# EAGLE board mbed 6LoWPAN Border Router HAT (EAGLE 7.6.0)
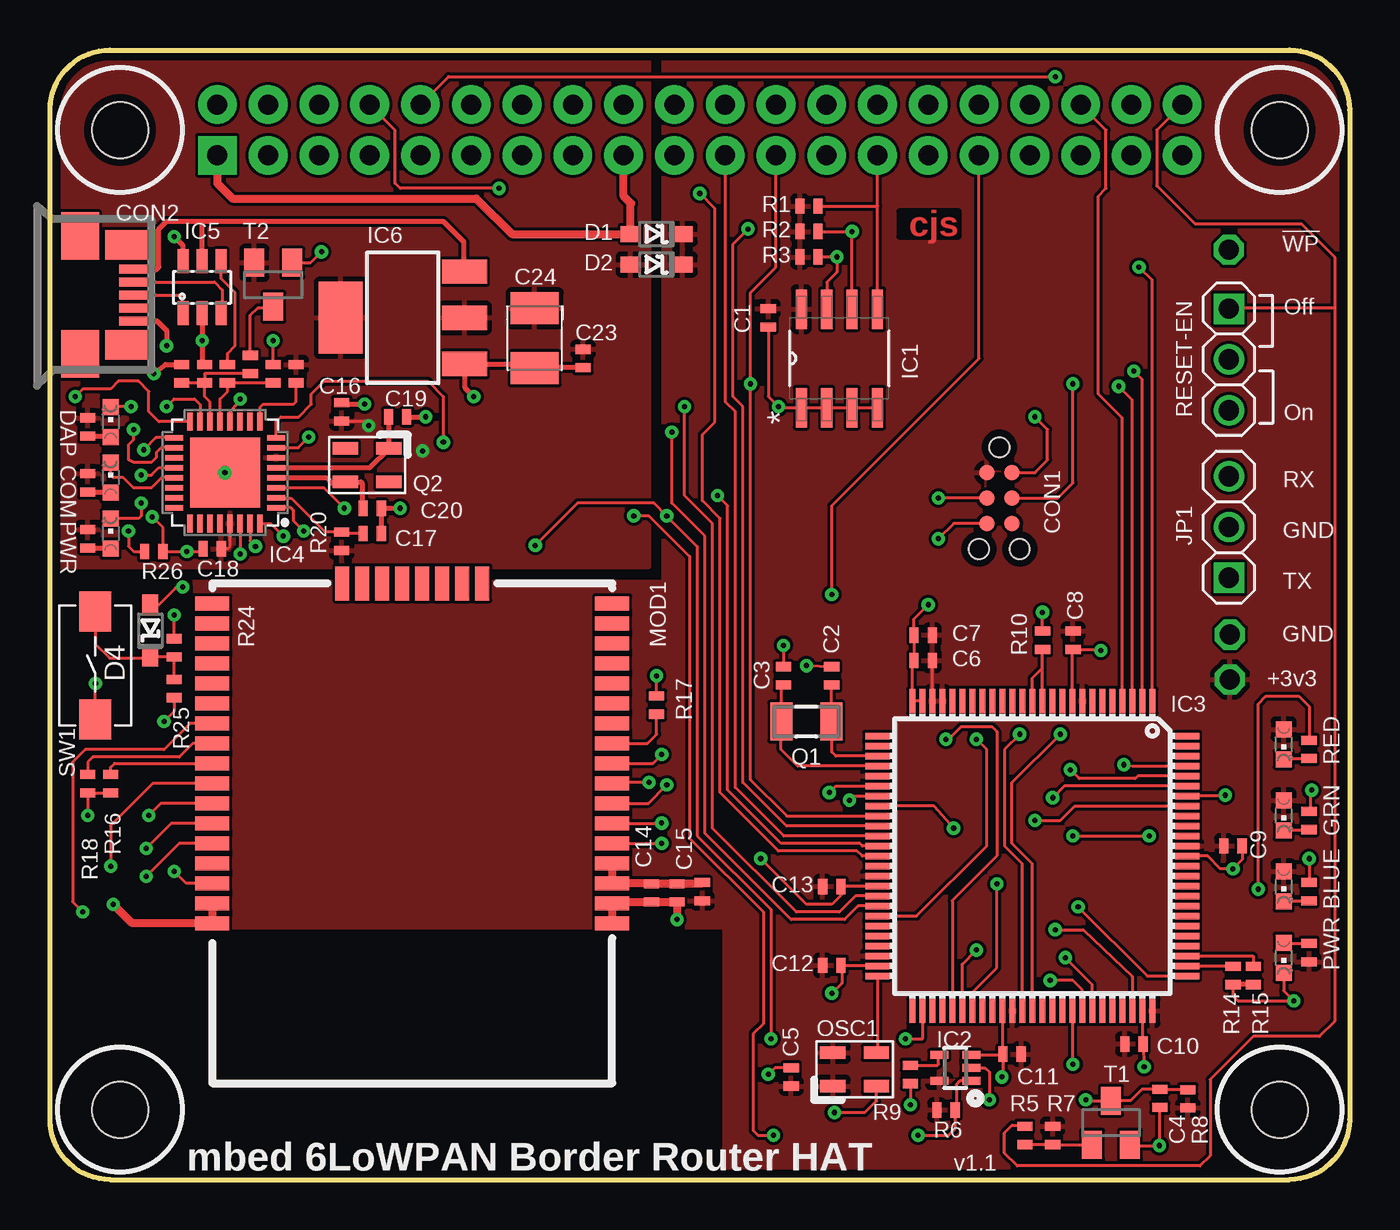
[diagram p0: board, top side]
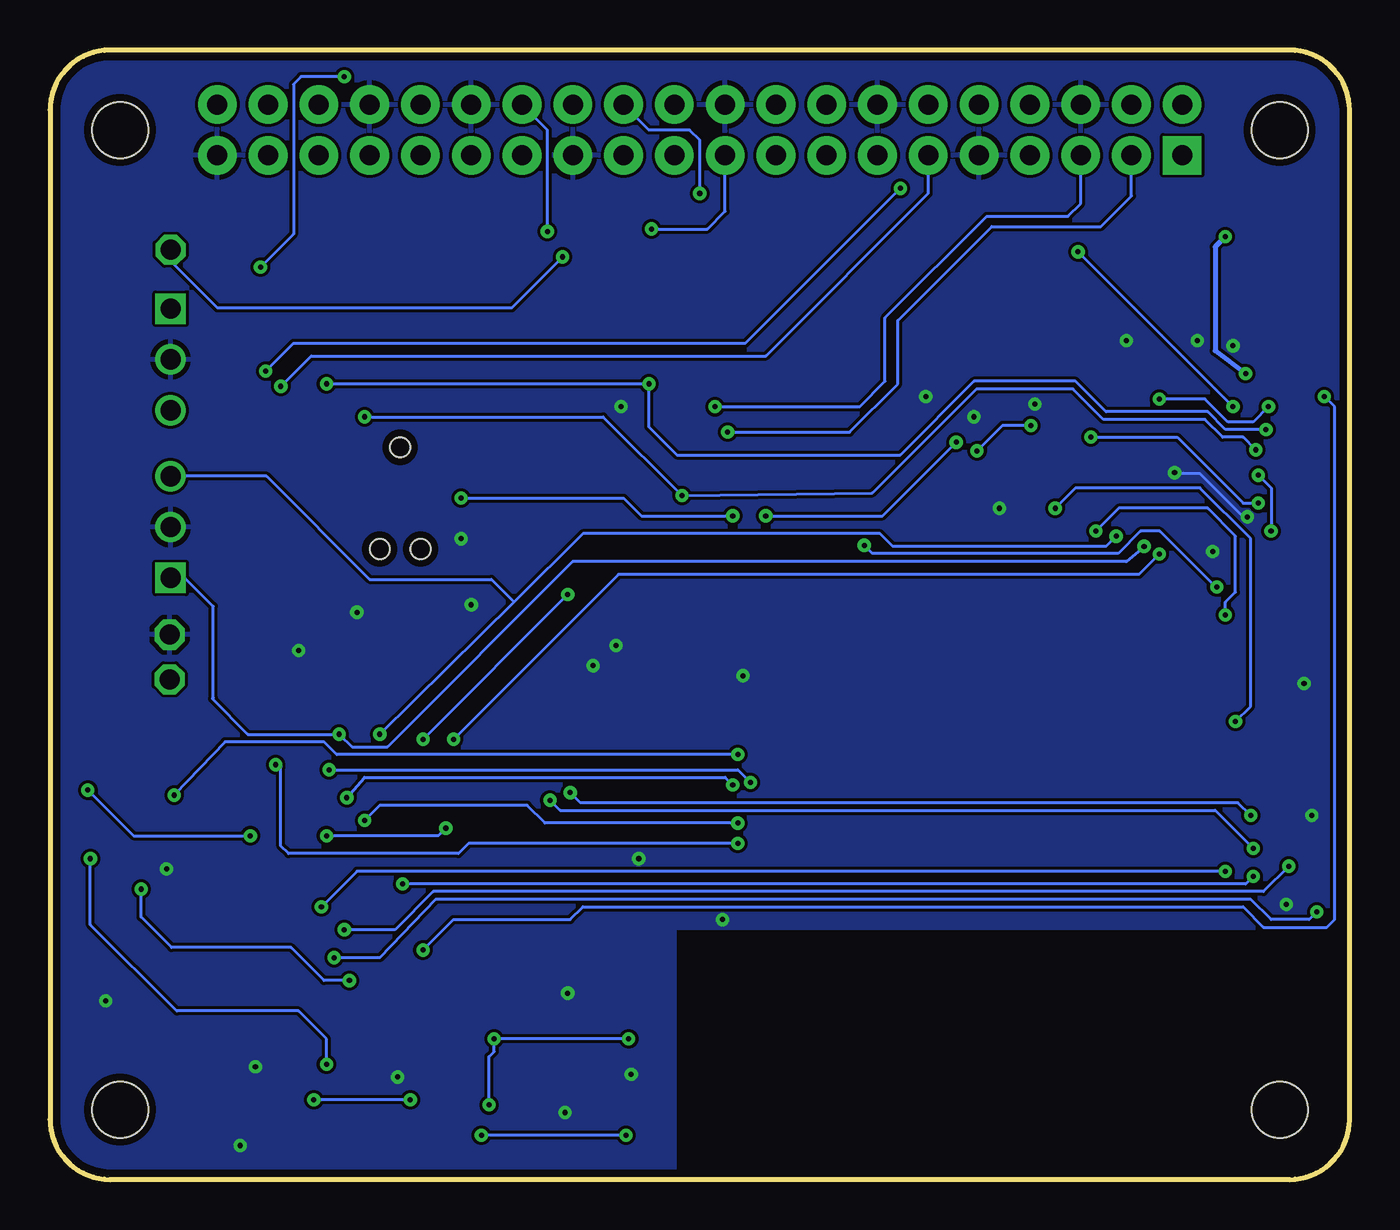
[diagram p1: board, bottom side, seen from below]

Size 65 x 56.5 mm. Coordinates in mm from the lower left corner, seen from the top.
Copper layers ((1*16)): Top 0.035mm / dielectric 0.8mm / Bottom 0.035mm
Design rules "mbed-HDK-6-6-2-layer": minimum track width 6mil, minimum drill 9mil, track to track 6mil, track to pad 6mil, pad to pad 6mil, via to via 6mil, smd to smd 6mil, copper to edge 15mil, drill to drill 8mil, minimum pad ring 10mil, minimum via ring 8mil, stop-mask expansion 4mil, vias tented up to drill 0mil, thermal gap 10mil
Net classes: 0 default: width 0.152 mm, drill 0.305 mm, clearance 0.152 mm

## Footprints (pad centres in the part's own frame; a part is rotated, then mirrored left to right if it is on the bottom)
RPI-HAT = drill 1 pad 1.93 square: 1 -24.13,-1.27 | drill 1 pad 1.93: 2 -24.13,1.27; 3 -21.59,-1.27; 4 -21.59,1.27; 5 -19.05,-1.27; 6 -19.05,1.27; 7 -16.51,-1.27; 8 -16.51,1.27; 9 -13.97,-1.27; 10 -13.97,1.27; 11 -11.43,-1.27; 12 -11.43,1.27; 13 -8.89,-1.27; 14 -8.89,1.27; 15 -6.35,-1.27; 16 -6.35,1.27; 17 -3.81,-1.27; 18 -3.81,1.27; 19 -1.27,-1.27; 20 -1.27,1.27; 21 1.27,-1.27; 22 1.27,1.27; 23 3.81,-1.27; 24 3.81,1.27; 25 6.35,-1.27; 26 6.35,1.27; 27 8.89,-1.27; 28 8.89,1.27; 29 11.43,-1.27; 30 11.43,1.27; 31 13.97,-1.27; 32 13.97,1.27; 33 16.51,-1.27; 34 16.51,1.27; 35 19.05,-1.27; 36 19.05,1.27; 37 21.59,-1.27; 38 21.59,1.27; 39 24.13,-1.27; 40 24.13,1.27 | hole 2.8: -29,-49; 29,-49; 29,0; -29,0
0402 = smd 0.457 x 0.762: 1 -0.457,0; 2 0.457,0
SMC_B = smd 1.6 x 2.4: + -1.5,0; - 1.5,0
TC2030-CTX-NL = smd 0.787 x 0.787: 1 -1.27,-0.635; 2 -1.27,0.635; 3 0,-0.635; 4 0,0.635; 5 1.27,-0.635; 6 1.27,0.635 | hole 0.991: -2.54,0; 2.54,1.016; 2.54,-1.016
MOLEX-47364-0001 = smd 1.7 x 0.45: 4 2.8,-0.65; D+ 2.8,0; D- 2.8,0.65; GND 2.8,-1.3; VBUS 2.8,1.3 | smd 1.9 x 2.375: GND1 0,2.95; GND4 0,-2.95 | smd 2.1 x 1.475: GND2 2.3,2.5; GND3 2.3,-2.5
SOD323 = smd 1 x 0.8: A 1.3,0; K -1.3,0
SOIC127P600X175-8N = smd 1.981 x 0.559: 1 -2.464,1.905; 2 -2.464,0.635; 3 -2.464,-0.635; 4 -2.464,-1.905; 5 2.464,-1.905; 6 2.464,-0.635; 7 2.464,0.635; 8 2.464,1.905
SOT353 = smd 0.4 x 0.9: 1 -0.65,-0.8; 2 0,-0.8; 3 0.65,-0.8; 4 0.65,0.8; 5 -0.65,0.8
LQFP100 = smd 1.2 x 0.32: 1 -7.75,6; 2 -7.75,5.5; 3 -7.75,5; 4 -7.75,4.5; 5 -7.75,4; 6 -7.75,3.5; 7 -7.75,3; 8 -7.75,2.5; 9 -7.75,2; 10 -7.75,1.5; 11 -7.75,1; 12 -7.75,0.5; 13 -7.75,0; 14 -7.75,-0.5; 15 -7.75,-1; 16 -7.75,-1.5; 17 -7.75,-2; 18 -7.75,-2.5; 19 -7.75,-3; 20 -7.75,-3.5; 21 -7.75,-4; 22 -7.75,-4.5; 23 -7.75,-5; 24 -7.75,-5.5; 25 -7.75,-6; 51 7.75,-6; 52 7.75,-5.5; 53 7.75,-5; 54 7.75,-4.5; 55 7.75,-4; 56 7.75,-3.5; 57 7.75,-3; 58 7.75,-2.5; 59 7.75,-2; 60 7.75,-1.5; 61 7.75,-1; 62 7.75,-0.5; 63 7.75,0; 64 7.75,0.5; 65 7.75,1; 66 7.75,1.5; 67 7.75,2; 68 7.75,2.5; 69 7.75,3; 70 7.75,3.5; 71 7.75,4; 72 7.75,4.5; 73 7.75,5; 74 7.75,5.5; 75 7.75,6 | smd 0.32 x 1.2: 26 -6,-7.75; 27 -5.5,-7.75; 28 -5,-7.75; 29 -4.5,-7.75; 30 -4,-7.75; 31 -3.5,-7.75; 32 -3,-7.75; 33 -2.5,-7.75; 34 -2,-7.75; 35 -1.5,-7.75; 36 -1,-7.75; 37 -0.5,-7.75; 38 0,-7.75; 39 0.5,-7.75; 40 1,-7.75; 41 1.5,-7.75; 42 2,-7.75; 43 2.5,-7.75; 44 3,-7.75; 45 3.5,-7.75; 46 4,-7.75; 47 4.5,-7.75; 48 5,-7.75; 49 5.5,-7.75; 50 6,-7.75; 76 6,7.75; 77 5.5,7.75; 78 5,7.75; 79 4.5,7.75; 80 4,7.75; 81 3.5,7.75; 82 3,7.75; 83 2.5,7.75; 84 2,7.75; 85 1.5,7.75; 86 1,7.75; 87 0.5,7.75; 88 0,7.75; 89 -0.5,7.75; 90 -1,7.75; 91 -1.5,7.75; 92 -2,7.75; 93 -2.5,7.75; 94 -3,7.75; 95 -3.5,7.75; 96 -4,7.75; 97 -4.5,7.75; 98 -5,7.75; 99 -5.5,7.75; 100 -6,7.75
SOT617-3 = smd 0.9 x 0.29: 1 -2.55,1.75; 2 -2.55,1.25; 3 -2.55,0.75; 4 -2.55,0.25; 5 -2.55,-0.25; 6 -2.55,-0.75; 7 -2.55,-1.25; 8 -2.55,-1.75; 17 2.55,-1.75; 18 2.55,-1.25; 19 2.55,-0.75; 20 2.55,-0.25; 21 2.55,0.25; 22 2.55,0.75; 23 2.55,1.25; 24 2.55,1.75 | smd 0.29 x 0.9: 9 -1.75,-2.55; 10 -1.25,-2.55; 11 -0.75,-2.55; 12 -0.25,-2.55; 13 0.25,-2.55; 14 0.75,-2.55; 15 1.25,-2.55; 16 1.75,-2.55; 25 1.75,2.55; 26 1.25,2.55; 27 0.75,2.55; 28 0.25,2.55; 29 -0.25,2.55; 30 -0.75,2.55; 31 -1.25,2.55; 32 -1.75,2.55 | smd 3.5 x 3.5: 33 0,0
SOT23-6L = smd 0.55 x 1.2: 1 -0.95,-1.3; 2 0,-1.3; 3 0.95,-1.3; 4 0.95,1.3; 5 0,1.3; 6 -0.95,1.3
SOT223 = smd 1.219 x 2.235: 1 -2.311,-3.099; 2 0,-3.099; 3 2.311,-3.099 | smd 3.6 x 2.2: 4 0,3.099
1X03 = drill 1.016 square: 1 -2.54,0 | drill 1.016: 2 0,0; 3 2.54,0
CHIPLED_0603 = smd 0.8 x 0.8: A 0,-0.75; C 0,0.75
ATZB-RF-233-1-C = smd 0.7 x 1.7: 1 16,20; 2 15,20; 3 14,20; 4 13,20; 5 12,20; 6 11,20; 7 10,20; 8 9,20; 9 8,20; 10 7,20; 11 6,20; 12 5,20; 13 4,20; 14 3,20; 15 2,20; 16 1,20; 17 0,20; 26 0,0; 27 1,0; 28 2,0; 29 3,0; 30 4,0; 31 5,0; 32 6,0; 33 7,0; 34 8,0; 35 9,0; 36 10,0; 37 11,0; 38 12,0; 39 13,0; 40 14,0; 41 15,0; 42 16,0 | smd 1.7 x 0.7: 18 -1,13.5; 19 -1,12.5; 20 -1,11.5; 21 -1,10.5; 22 -1,9.5; 23 -1,8.5; 24 -1,7.5; 25 -1,6.5
3.2X.2.5 = smd 1.27 x 0.635: P$1 -1.092,-0.838; P$2 1.092,-0.838; P$3 1.092,0.838; P$4 -1.092,0.838
FC135 = smd 1.1 x 1.9: X1 -1.25,0; X2 1.25,0
DTSM-32S-B = smd 2 x 1.6: P$1 -2.7,0; P$2 2.7,0
SOT23 = smd 1 x 1.4: 1 -0.95,-1.1; 2 0.95,-1.1; 3 0,1.1
TP50-PTH = drill 1 octagon: TP 0,0

## Placement (x,y rotation side)
BRD1  RPI-HAT  [RPI-HAT]  32.5,52.5 0 top
C1  100nF  [0402]  35.93,43.1 270 top
C2  18pF  [0402]  39.1,25.19 90 top
C3  18pF  [0402]  36.69,25.19 90 top
C4  100nF  [0402]  55.51,4.06 270 top
C5  100nF  [0402]  37.07,5.13 90 top
C6  100nF  [0402]  43.68,25.96 180 top
C7  100nF  [0402]  43.68,27.23 180 top
C8  100nF  [0402]  51.17,26.97 270 top
C9  100nF  [0402]  59.17,16.69 0 top
C10  100nF  [0402]  54.22,6.78 0 top
C11  100nF  [0402]  48.12,6.27 180 top
C12  100nF  [0402]  39.1,10.72 0 top
C13  100nF  [0402]  39.1,14.65 0 top
C14  100nF  [0402]  30.09,14.34 270 top
C15  100nF  [0402]  31.36,14.34 270 top
C16  100nF  [0402]  14.59,38.4 90 top
C17  100nF  [0402]  16.12,32.31 0 top
C18  100nF  [0402]  8.12,31.54 180 top
C19  18pF  [0402]  17.39,38.15 0 top
C20  18pF  [0402]  16.12,33.58 0 top
C21  18pF  [0402]  11.16,40.31 90 top
C22  18pF  [0402]  7.74,40.31 90 top
C23  100nF  [0402]  26.66,41.07 270 top
C24  10uF  [SMC_B]  24.25,42.09 270 top
CON1  TC2030-CTX-NL  [TC2030-CTX-NL]  47.49,34.08 270 top
CON2  USB_MICROB  [MOLEX-47364-0001]  1.51,44.24 0 top
D1  BAT60A  [SOD323]  30.34,47.29 180 top
D2  BAT60A  [SOD323]  30.34,45.77 180 top
D4  BAT60J  [SOD323]  5.02,27.46 90 top
IC1  CAT24C32WI-GT3  [SOIC127P600X175-8N]  39.48,41.07 90 top
IC2  74LVC1G08SE-7  [SOT353]  45.28,5.59 90 top
IC3  MK64FN1M0VLL12  [LQFP100]  49.14,16.18 270 top
IC4  LPC11U35FHI33/501  [SOT617-3]  8.75,35.35 180 top
IC5  USBLC6-2SC6  [SOT23-6L]  7.61,44.63 0 top
IC6  LD1117S33  [SOT223]  17.64,43.1 90 top
JP1  1X03  [1X03]  58.97,32.64 90 top
L1  BLM15BB221SN1D  [0402]  32.63,14.4 90 top
LED1  RED  [CHIPLED_0603]  61.71,11.1 180 top
LED2  RED  [CHIPLED_0603]  61.71,21.77 180 top
LED3  GREEN  [CHIPLED_0603]  61.71,18.21 180 top
LED4  BLUE  [CHIPLED_0603]  61.71,14.65 180 top
LED5  BLUE  [CHIPLED_0603]  3.04,37.89 0 top
LED6  GREEN  [CHIPLED_0603]  3.04,35.1 0 top
LED7  RED  [CHIPLED_0603]  3.04,32.31 0 top
MOD1  ATZB-RF-233-1-C  [ATZB-RF-233-1-C]  8.12,28.81 270 top
OSC1  50MHz  [3.2X.2.5]  40.25,5.51 0 top
Q1  32.768kHz  [FC135]  37.83,22.91 180 top
Q2  12MHz  [3.2X.2.5]  15.86,35.74 180 top
R1  4k7  [0402]  37.96,48.69 180 top
R2  4k7  [0402]  37.96,47.42 180 top
R3  4k7  [0402]  37.96,46.15 180 top
R4  470R  [0402]  62.98,11.35 270 top
R5  220R  [0402]  48.76,2.21 90 top
R6  10k  [0402]  44.82,3.48 0 top
R7  10k  [0402]  50.15,2.21 270 top
R8  10k  [0402]  56.91,4.04 270 top
R9  1k  [0402]  43.04,5.26 90 top
R10  10k  [0402]  49.64,26.97 90 top
R11  470R  [0402]  62.98,21.51 270 top
R12  470R  [0402]  62.98,17.96 270 top
R13  220R  [0402]  62.98,14.4 270 top
R14  10k  [0402]  59.17,10.21 270 top
R15  10k  [0402]  60.19,10.21 270 top
R16  10k  [0402]  3.04,19.8 270 top
R17  10k  [0402]  30.34,23.73 90 top
R18  10k  [0402]  1.89,19.8 90 top
R19  10k  [0402]  12.31,40.31 90 top
R20  10k  [0402]  14.59,31.93 270 top
R21  220R  [0402]  1.89,37.64 270 top
R22  470R  [0402]  1.89,34.85 270 top
R23  470R  [0402]  1.89,32.05 270 top
R24  33R  [0402]  6.21,26.59 270 top
R25  33R  [0402]  6.21,24.56 90 top
R26  10k  [0402]  5.2,31.42 180 top
R27  1k5  [0402]  10.02,40.77 270 top
R28  33R  [0402]  8.88,40.31 270 top
R29  33R  [0402]  6.59,40.31 270 top
RESET-EN  1X03  [1X03]  58.97,41.02 270 top
SW1  SPST  [DTSM-32S-B]  2.27,25.7 90 top
T1  BC850  [SOT23]  53.07,2.84 0 top
T2  BSS84  [SOT23]  11.16,44.75 180 top
TP1  TEST-POINT-50R-PTH  [TP50-PTH]  59.02,25.02 0 top
TP2  TEST-POINT-50R-PTH  [TP50-PTH]  59.02,27.25 0 top
TP16  TEST-POINT-50R-PTH  [TP50-PTH]  58.97,46.51 0 top

## Library data of the parts
BRD1 C1-C23 CON1 IC3 IC5 IC6 JP1 L1 LED1-LED7 OSC1 Q1 Q2 R1-R29 RESET-EN SW1 T1 T2 TP1 TP2 TP16 = mbed-HDK
C24 = mbed-HDK; MF: Kemet; MFN: T491B106K020AT; OC-DIGIKEY: 399-8298-1-ND; OC-MOUSER: 80-T491B106K020; OC-NEWARK: 57K1740
CON2 = mbed-HDK; MF: MOLEX; MFN: 47346-0001; OC-MOUSER: 538-47346-0001; OC-NEWARK: 1568026
D1 D2 = mbed-HDK; MF: Infineon; MFN: BAT60AE6327HTSA1; OC-DIGIKEY: BAT60AE6327HTSA1CT-ND; OC-MOUSER: 726-BAT60AE6327; OC-NEWARK: 85X4127
D4 = mbed-HDK; MF: STMicroelectronics; MFN: BAT60JFILM; OC-DIGIKEY: 497-3707-6-ND; OC-MOUSER: 511-BAT60JFILM; OC-NEWARK: 89K1218
IC1 = mbed-HDK; MPN: CAT24C32WI-GT3; OC_FARNELL: 1718129; OC_NEWARK: 08R5414; PACKAGE: SOIC-8; SUPPLIER: CATALYST SEMICONDUCTOR
IC2 = mbed-HDK; MF: Diodes Inc.; MFN: 74LVC1G08SE-7; OC-DIGIKEY: 74LVC1G08SE-7DICT-ND; OC-MOUSER: 621-74LVC1G08SE-7; OC-NEWARK: 12T8904
IC4 = mbed-HDK; FLASH: 64kB; GPIO: 26; MF: NXP Semiconductors; MFN: LPC11U35FHI33/501,; NEWARK-OC: 24W5342; OC-DIGIKEY: 568-9586-ND; OC-MOUSER: 771-LPC11U35FHI33501; SRAM: 12kB
MOD1 = mbed-HDK; MF: Atmel; MFN: ATZB-RF-233-1-CR; OC-DIGIKEY: ATZB-RF-233-1-CRCT-ND; OC-NEWARK: 27X8560

## Nets
50MHZ: IC3.50 OSC1.P$3
+3.3V: C1.1 C5.1 C6.1 C7.1 C8.1 C9.1 C10.1 C11.1 C12.1 C13.1 CON1.1 D1.K D2.K IC1.8 IC2.5 IC3.8 IC3.22 IC3.23 IC3.30 IC3.40 IC3.48 IC3.61 IC3.75 IC3.89 L1.1 LED2.A LED3.A LED4.A OSC1.P$1 OSC1.P$4 R1.2 R2.2 R3.2 R4.2 R6.1 R7.1 R8.2 TP1.TP
+3.3V_IF: C16.1 C18.1 C23.1 C24.+ D2.A IC4.6 IC4.29 IC6.2 IC6.4 R19.2 R20.2 R21.1 R22.1 R23.1 T2.2
D+: CON2.D+ IC5.1
D-: CON2.D- IC5.3
DM: C21.1 IC4.13 R28.2
DP: C22.1 IC4.14 R27.2 R29.2
EZP_DI: BRD1.19 IC3.35
EZP_DO: BRD1.21 IC3.36
EZP_NCS: BRD1.24 IC3.38
GND: BRD1.6 BRD1.9 BRD1.14 BRD1.20 BRD1.25 BRD1.30 BRD1.34 BRD1.39 C1.2 C2.2 C3.2 C4.2 C5.2 C6.2 C7.2 C8.2 C9.2 C10.2 C11.2 C12.2 C13.2 C14.2 C15.2 C16.2 C17.2 C18.2 C19.2 C20.2 C21.2 C22.2 C23.2 C24.- CON1.5 CON2.GND IC1.1 IC1.2 IC1.3 IC1.4 IC2.3 IC3.9 IC3.24 IC3.25 IC3.41 IC3.49 IC3.60 IC3.74 IC3.88 IC4.33 IC5.2 IC6.1 JP1.2 LED1.C MOD1.1 MOD1.2 MOD1.41 MOD1.42 OSC1.P$2 R10.2 R14.2 R15.2 R16.2 R17.2 R18.1 R26.1 RESET-EN.2 SW1.P$1 T1.2 TP2.TP
IF_NRST: C17.1 IC4.2 R20.1
K64F_DAPLINK_CTS: IC3.56 IC4.16
K64F_DAPLINK_RTS: IC3.55 IC4.30
K64F_DAPLINK_RX: IC3.62 IC4.32 JP1.3
K64F_DAPLINK_TX: IC3.63 IC4.31 JP1.1
K64F_RPI_CTS: BRD1.11 IC3.3
K64F_RPI_RTS: BRD1.36 IC3.4
K64F_RPI_RX: BRD1.8 IC3.2
K64F_RPI_TX: BRD1.10 IC3.1
LED_BLUE: IC3.67 R13.1
LED_COM_GREEN: IC4.21 LED6.C
LED_DAP_BLUE: IC4.12 LED5.C
LED_GREEN: IC3.33 R12.1
LED_PWR_RED: IC4.7 LED7.C
LED_RED: IC3.68 R11.1
N$1: BRD1.1 BRD1.17 D1.A
N$2: C2.1 IC3.28 Q1.X1
N$3: C3.1 IC3.29 Q1.X2
N$4: IC3.77 R14.1
N$5: D4.K R24.2 R25.2 SW1.P$2
N$6: IC3.12 IC3.13 R10.1
N$7: MOD1.10 R17.1
N$8: LED2.C R11.2
N$9: LED3.C R12.2
N$10: LED4.C R13.2
N$11: MOD1.34 R16.1
N$12: MOD1.33 R18.2
N$13: C14.1 C15.1 L1.2 MOD1.3 MOD1.4
N$14: R5.1 R7.2 T1.1
N$15: IC2.4 R9.2
N$16: IC3.78 R15.1
N$17: LED1.A R4.1
N$18: C19.1 IC4.5 Q2.P$1
N$19: C20.1 IC4.4 Q2.P$3
N$20: IC4.9 R19.1
N$23: R27.1 T2.3
N$36: LED6.A R22.2
N$37: LED7.A R23.2
N$38: LED5.A R21.2
PTA14: BRD1.31 IC3.44
REMAP_IO: IC4.20 R26.2
RF_DIG3: IC3.69 MOD1.32
RF_FEM_SEL: IC3.57 MOD1.38
RF_IRQ: IC3.76 MOD1.40
RF_MISO: IC3.96 MOD1.8
RF_MOSI: IC3.95 MOD1.7
RF_NRESET: IC3.97 MOD1.5
RF_NSEL: IC3.93 MOD1.6
RF_SCL: IC3.31 MOD1.36
RF_SCLK: IC3.94 MOD1.9
RF_SDA: IC3.32 MOD1.37
RF_SLP_TR: IC3.73 MOD1.35
RPI_ID_SCL: BRD1.28 IC1.6 R2.1
RPI_ID_SDA: BRD1.27 IC1.5 R1.1
RPI_ID_WP: IC1.7 R3.1 TP16.TP
RPI_K64F_RESET: BRD1.40 R5.2 RESET-EN.1
RPI_SCL: BRD1.5 IC3.42
RPI_SDA: BRD1.3 IC3.43
TGT_NRESET: CON1.3 D4.A IC3.52 R9.1
TGT_NRESET_DAPLINK: IC2.1 IC4.8 R6.2
TGT_NRESET_FB: IC4.1 R24.1
TGT_NRESET_FB_ISP: IC4.3 R25.1
TGT_NRESET_RPI: C4.1 IC2.2 R8.1 T1.3
TGT_SWCLK: BRD1.23 CON1.4 IC3.34 IC4.18
TGT_SWDIO: CON1.2 IC3.37 IC4.17
USB-DM: IC5.4 R28.1
USB-DP: IC5.6 R29.1
USB-SCON: IC4.15 T2.1
VBUS_IF: CON2.VBUS IC5.5 IC6.3

## Tracks (layer width: path | path; a pad name or v marks a point on that pad's centre or on a via)
50MHZ
  Top 0.152: IC3.50 41.39,6.4 OSC1.P$3
+3.3V
  Top 0.152: IC3.23 C6.1
  pour Top: -0.01,29.89 30.72,29.89 30.72,56.56 65.01,56.56 65.01,-0.08 33.77,-0.08 33.77,12.62 -0.01,12.62
+3.3V_IF  (via drill 0.25)
  Top 0.152: 8.88,31.54 9.01,31.67 IC4.29 | C16.1 15.71,37.95 v15.94,37.72 | v18.63,36.45 18.68,36.45 18.78,36.35
  Bottom 0.152: v15.94,37.72 17.36,37.72 v18.63,36.45
  pour Top: -0.27,30.66 29.96,30.66 29.96,56.56 -0.27,56.56
D+
  Top 0.152: CON2.D+ 6.59,44.24 6.59,43.39 IC5.1
D-
  Top 0.152: CON2.D- 8.23,44.89 8.62,44.5 8.62,43.39 IC5.3
DM
  Top 0.152: IC4.13 8.5,39.04 8.88,39.42 R28.2 C21.1
DP
  Top 0.152: IC4.14 8,38.9 7.74,39.16 C22.1 | R29.2 C22.1 | R27.2 7.74,40.31 C22.1
EZP_DI  (via drill 0.25)
  Top 0.152: IC3.35 36.84,17.68 34.66,19.86 34.66,38.66 34.15,39.16 34.15,46.78 v34.91,47.55
  Bottom 0.152: v34.91,47.55 32.12,47.55 31.23,48.44 BRD1.19
EZP_DO
  Top 0.152: IC3.36 36.71,17.18 34.28,19.61 34.28,38.4 33.77,38.91 BRD1.21
EZP_NCS  (via drill 0.25)
  Top 0.152: IC3.38 40.63,16.18 40.37,16.43 36.44,16.43 33.52,19.35 33.52,33.07 32.63,33.96 32.63,37.26 33.26,37.89 33.26,48.56 v32.5,49.32
  Bottom 0.152: v32.5,49.32 32.5,51.99 33.01,52.5 35.04,52.5 BRD1.24
GND  (via drill 0.25)
  Top 0.152: C5.2 36.26,5.59 v35.93,5.26 | IC3.49 39.6,10.68 | 39.6,10.68 C12.2 | IC3.41 39.59,14.68 C13.2 39.56,14.22 39.1,13.76 37.83,13.76 v35.55,16.05 | IC3.24 IC3.25 43.14,25.87 C6.2 C7.2 43.22,28.04 v43.93,28.75 | v54.72,5.64 C10.2 54.64,6.82 IC3.74 | IC3.60 47.64,6.3 C11.2 | C11.2 47.66,4.93 v47.61,5.13 | 39.6,10.68 39.6,9.82 v39.1,9.32 | R16.2 R18.1 v1.89,18.21 | LED1.C 61.71,9.45 v62.22,8.94 59.42,8.94 59.17,9.19 R14.2 | C9.2 59.63,16 v59.17,15.54 58.53,15.54 57.9,16.18 IC3.88 | v36.69,26.72 C3.2 | v37.83,25.7 C2.2 | C1.2 35.93,39.16 v36.44,38.66 36.49,38.61 IC1.1 IC1.2 IC1.3 IC1.4 | T1.2 54.07,1.7 v55.49,1.7 55.49,3.58 C4.2 | R17.2 v30.34,25.19 | IC3.9 51.14,26.48 C8.2 52.52,26.52 v52.57,26.46 | R10.2 v49.64,28.37 | C21.2 v11.16,41.96 | CON1.5 45.2,32.81 v44.44,32.05 | SW1.P$1 v2.27,24.81 | C18.2 7.53,31.42 v6.85,31.42 R26.1 5.65,32.61 v5.12,33.14 | IC2.3 47.63,6.24 C11.2 | v39.23,3.35 40.75,3.35 41.34,3.93 OSC1.P$2 | 24.25,40.56 C24.-
  Top 0.254: IC5.2 v7.61,41.96 7.61,40.77 C22.2 | CON2.GND 5.35,42.94 5.83,42.47 v5.83,41.7 | C19.2 v18.78,38.15 | C16.2 14.67,38.78 v15.74,38.78 | C17.2 C20.2 v17.51,33.58 | C23.2 24.3,40.61 24.25,40.56 24.01,40.79 IC6.1 20.74,39.62 v21.2,39.16 | R15.2 R14.2
  Top 0.406: MOD1.1 MOD1.2 28.18,13.88 C14.2 C15.2 v31.36,13 | v3.16,13.76 4.11,12.81 MOD1.42 MOD1.41 | 39.61,14.7 C13.2
  Bottom 0.152: IC4.33 8.73,35.33 7.51,35.33 5.32,33.14 v5.12,33.14
  other vias: 8.75,35.35
  pour Bottom: 33.77,12.62 -0.01,12.62 -0.01,56.56 65.01,56.56 65.01,-0.08 33.77,-0.08
IF_NRST
  Top 0.152: C17.1 14.67,32.31 R20.1 13.76,32.38 12.05,34.08 11.32,34.08 IC4.2
K64F_DAPLINK_CTS  (via drill 0.25)
  Top 0.152: IC4.16 5.44,37.91 4.94,38.4 4.94,39.42 4.43,39.93 3.42,39.93 3.04,39.55 1.64,39.55 v1.26,39.16 | IC3.56 45.64,10.77 v46.34,11.48
  Bottom 0.152: v46.34,11.48 44.82,13 38.98,13 38.34,13.64 5.32,13.64 4.31,12.62 1.13,12.62 0.75,13 0.75,38.66 v1.26,39.16
K64F_DAPLINK_RTS  (via drill 0.25)
  Top 0.152: IC4.30 9.5,31.3 v9.51,31.29 | v44.82,22.02 44.95,22.02 45.58,22.65 47.11,22.65 47.36,22.4 47.36,16.18 45.14,13.96 IC3.55
  Bottom 0.152: v9.51,31.29 10.53,30.27 36.56,30.27 v44.82,22.02
K64F_DAPLINK_RX  (via drill 0.25)
  Top 0.152: IC4.32 11.05,32.8 v11.67,32.18 | IC3.62 48.64,15.79 47.74,16.69 47.74,21.51 v48.5,22.27
  Bottom 0.152: v11.67,32.18 12.18,31.67 22.85,31.67 23.48,32.31 38.34,32.31 41.79,28.9 | 41.79,28.9 v48.5,22.27 | 41.79,28.9 42.92,30.02 49.01,30.02 54.17,35.18 JP1.3
K64F_DAPLINK_TX  (via drill 0.25)
  Top 0.152: IC4.31 10,31.95 v10.28,31.67 | IC3.63 49.14,15.8 48.12,16.81 48.12,19.86 v50.53,22.27
  Bottom 0.152: v10.28,31.67 11.16,30.91 38.85,30.91 48.12,21.64 49.9,21.64 v50.53,22.27 55.11,22.27 56.88,24.05 56.83,24.1 56.83,28.67 58.26,30.1 JP1.1
K64F_RPI_CTS  (via drill 0.25)
  Top 0.152: IC3.3 54.14,38.99 v53.45,39.67
  Bottom 0.152: v53.45,39.67 51.93,41.2 29.2,41.2 21.07,49.32 BRD1.11
K64F_RPI_RTS
  Top 0.152: IC3.4 53.64,38.09 52.44,39.29 52.44,49.2 52.82,49.58 52.82,52.5 BRD1.36
K64F_RPI_RX  (via drill 0.25)
  Top 0.152: IC3.2 54.64,40.02 v54.22,40.43 | v22.47,49.58 17.51,49.58 17.26,49.83 17.26,52.5 BRD1.8
  Bottom 0.152: v54.22,40.43 52.82,41.83 30.21,41.83 v22.47,49.58
K64F_RPI_TX  (via drill 0.25)
  Top 0.152: IC3.1 55.14,44.98 v54.47,45.64 | BRD1.10 19.93,55.17 v50.28,55.17
  Bottom 0.152: v54.47,45.64 52.82,47.29 52.82,54.79 52.44,55.17 v50.28,55.17
LED_BLUE  (via drill 0.25)
  Top 0.152: IC3.67 51.14,5.8 v51.17,5.76 | v62.98,16.05 R13.1
  Bottom 0.152: v51.17,5.76 51.17,7.03 52.57,8.43 58.66,8.43 62.98,12.75 v62.98,16.05
LED_COM_GREEN
  Top 0.152: IC4.21 5.58,35.1 5.07,34.59 4.18,34.59 3.67,35.1 3.16,35.1 3.04,35.23 LED6.C
  Top 0.254: 3.05,35.86 LED6.C
LED_DAP_BLUE  (via drill 0.25)
  Top 0.152: IC4.12 9,38.4 v9.51,39.04 | 3.18,38.78 3.05,38.66 | v4.05,38.66 3.05,38.66 | 3.05,38.66 LED5.C
  Bottom 0.152: v4.05,38.66 4.81,37.89 6.08,37.89 7.23,39.04 v9.51,39.04
LED_GREEN  (via drill 0.25)
  Top 0.152: v45.2,17.57 44.22,18.68 IC3.33 | R12.1 63.06,18.34 63.06,19.43 v63.11,19.48 | v51.17,17.19 v54.98,17.19
  Bottom 0.152: v63.11,19.48 60.82,17.19 v54.98,17.19 | v45.2,17.57 45.58,17.19 v51.17,17.19
LED_PWR_RED  (via drill 0.25)
  Top 0.152: IC4.7 12.41,36.6 v12.94,37.13 | v4.56,33.83 4.56,33.2 4.43,33.07 LED7.C
  Bottom 0.152: v12.94,37.13 8.62,37.13 5.32,33.83 v4.56,33.83
LED_RED  (via drill 0.25)
  Top 0.152: IC3.68 51.64,9.49 51.17,9.95 v50.03,9.95 | v60.44,14.53 60.44,23.8 60.82,24.18 62.47,24.18 62.98,23.67 R11.1
  Bottom 0.152: v50.03,9.95 51.3,9.95 52.95,11.61 58.92,11.61 60.44,13.13 v60.44,14.53
N$1
  Top 0.406: BRD1.17 28.69,49.2 29.07,48.82 29.04,48.79 D1.A 23.1,47.29 21.32,49.07 9.13,49.07 8.37,49.83 BRD1.1
N$2
  Top 0.152: IC3.28 39.31,21.18 39.1,21.38 39.1,22.89 Q1.X1 39.08,24.72 C2.1
N$3
  Top 0.152: IC3.29 37.4,20.68 36.56,21.51 36.56,22.89 Q1.X2 36.58,24.63 C3.1
N$4
  Top 0.152: IC3.77 R14.1
N$5
  Top 0.152: R25.2 R24.2 6.21,26.16 D4.K 4.72,26.16 4.72,26.08 2.99,26.08 2.27,26.79 SW1.P$2
  Top 0.254: 6.17,26.18 R24.2
N$6
  Top 0.152: IC3.12 49.64,25.58 | 49.64,25.58 49.64,26.51 R10.1 | IC3.13 49.14,25.08 49.64,25.58
N$7
  Top 0.152: MOD1.10 29.88,21.81 30.34,22.27 R17.1
N$8
  Top 0.152: LED2.C 61.75,21.05 R11.2
N$9
  Top 0.152: LED3.C 61.75,17.5 R12.2
N$10
  Top 0.152: LED4.C 61.75,13.94 R13.2
N$11
  Top 0.152: R16.1 3.04,20.62 3.23,20.81 MOD1.34
N$12
  Top 0.152: MOD1.33 7.15,21.81 6.47,21.13 2.15,21.13 1.89,20.88 R18.2
N$13
  Top 0.406: L1.2 32.56,14.79 C15.1 C14.1 30.07,14.81 MOD1.3 MOD1.4
N$14
  Top 0.152: R5.1 R7.2 T1.1
N$15
  Top 0.152: R9.2 44.39,5.71 44.44,5.76 44.44,6.2 IC2.4
N$16
  Top 0.152: IC3.78 60.19,11.18 R15.1
N$17
  Top 0.152: LED1.A 61.75,11.81 R4.1
N$18
  Top 0.254: IC4.5 15.99,35.6 Q2.P$1 16.93,36.6 C19.1
N$19
  Top 0.152: 15.61,33.63 C20.1
  Top 0.254: IC4.4 13.83,35.1 14.09,34.85 14.72,34.85 Q2.P$3 15.56,34.9 15.61,34.85 15.61,33.63
N$20
  Top 0.152: IC4.9 10.5,38.63 10.66,38.78 12.18,38.78 12.31,38.91 R19.1
N$23
  Top 0.152: R27.1 10.02,43.23 10.4,43.61 11.12,43.61 T2.3
N$36
  Top 0.254: R22.2 3.04,34.39 LED6.A
N$37
  Top 0.254: R23.2 3.04,31.6 LED7.A
N$38
  Top 0.254: R21.2 3.04,37.18 LED5.A
PTA14  (via drill 0.25)
  Top 0.152: IC3.44 43.34,13.18 46.85,16.69 46.85,21.51 v46.34,22.02 | v39.1,29.26 39.1,33.7 46.47,41.07 BRD1.31
  Bottom 0.152: v46.34,22.02 v39.1,29.26
REMAP_IO  (via drill 0.25)
  Top 0.152: v4.56,35.23 5.07,35.23 5.45,35.61 IC4.20 | v3.93,32.43 3.93,31.67 4.18,31.42 R26.2
  Bottom 0.152: v4.56,35.23 3.93,34.59 v3.93,32.43
RF_DIG3  (via drill 0.25)
  Top 0.152: v1.64,13.38 1.13,13.89 1.13,20.88 1.77,21.51 5.7,21.51 7.01,22.81 MOD1.32 | IC3.69 52.14,9.75 v50.79,11.1
  Bottom 0.152: v1.64,13.38 2.02,13 3.93,13 4.94,14.02 45.71,14.02 48.5,11.1 v50.79,11.1
RF_FEM_SEL  (via drill 0.25)
  Top 0.152: MOD1.38 6.47,16.81 v4.81,15.16 | IC3.57 46.14,9.37 47.36,10.59 v47.36,14.78
  Bottom 0.152: v4.81,15.16 5.2,14.78 v47.36,14.78
RF_IRQ  (via drill 0.25)
  Top 0.152: MOD1.40 6.81,14.81 v6.21,15.42 | v51.42,13.64 54.88,10.18 IC3.76
  Bottom 0.152: v6.21,15.42 49.64,15.42 v51.42,13.64
RF_MISO  (via drill 0.25)
  Top 0.152: v51.04,20.5 51.49,20.05 54.28,20.05 54.41,20.18 IC3.96 | v29.96,19.86 28.16,19.86 MOD1.8
  Bottom 0.152: v51.04,20.5 30.6,20.5 v29.96,19.86
RF_MOSI  (via drill 0.25)
  Top 0.152: IC3.95 50.73,19.68 v50.15,19.1 | MOD1.7 29.93,18.81 v30.85,19.73
  Bottom 0.152: v50.15,19.1 49.26,20.11 31.23,20.11 v30.85,19.73
RF_NRESET  (via drill 0.25)
  Top 0.152: MOD1.5 29.83,16.81 v30.6,16.81 | v53.71,20.75 54.16,20.68 IC3.97
  Bottom 0.152: v30.6,16.81 44.06,16.81 44.56,16.3 53.07,16.3 53.45,16.69 53.45,20.62 v53.71,20.75
RF_NSEL  (via drill 0.25)
  Top 0.152: MOD1.6 30.33,17.81 v30.6,17.83 | v49.26,17.96 50.53,17.96 51.26,18.68 IC3.93
  Bottom 0.152: v30.6,17.83 40.25,17.83 41.14,18.72 48.5,18.72 v49.26,17.96
RF_SCL  (via drill 0.25)
  Top 0.152: MOD1.36 5.55,18.81 v4.94,18.21 | v38.98,19.35 39.3,19.68 IC3.31
  Bottom 0.152: v4.94,18.21 5.58,18.84 38.47,18.84 v38.98,19.35
RF_SCLK  (via drill 0.25)
  Top 0.152: MOD1.9 30.15,20.81 v30.6,21.26 | v58.79,19.23 58.74,19.18 IC3.94
  Bottom 0.152: v30.6,21.26 50.66,21.26 51.3,21.89 56.25,21.89 v58.79,19.23
RF_SDA  (via drill 0.25)
  Top 0.152: MOD1.37 6.07,17.81 v4.81,16.56 | v39.99,18.97 40.2,19.18 IC3.32
  Bottom 0.152: v39.99,18.97 39.48,18.46 6.72,18.46 v4.81,16.56
RF_SLP_TR  (via drill 0.25)
  Top 0.152: MOD1.35 5.15,19.81 3.04,17.7 v3.04,15.67 | v50.28,12.49 51.68,12.49 54.14,10.16 IC3.73
  Bottom 0.152: v3.04,15.67 4.31,14.4 45.84,14.4 47.74,12.49 v50.28,12.49
RPI_ID_SCL  (via drill 0.25)
  Top 0.152: IC1.6 v40.12,47.42 R2.1
  Bottom 0.152: v40.12,47.42 40.12,52.5 BRD1.28
RPI_ID_SDA
  Top 0.152: IC1.5 41.39,48.69 | 41.39,48.69 BRD1.27 | R1.1 41.39,48.69
RPI_ID_WP  (via drill 0.25)
  Top 0.152: 38.47,46.1 R3.1 v39.36,46.15 39.36,45.39 38.85,44.88 IC1.7
  Bottom 0.152: v39.36,46.15 41.9,43.61 56.63,43.61 58.97,45.95 TP16.TP
RPI_K64F_RESET
  Top 0.152: BRD1.40 55.36,52.5 55.36,49.71 57.27,47.8 62.6,47.8 64.25,46.15 64.25,43.61 | 64.25,43.61 64.25,7.92 63.49,7.16 60.19,7.16 58.03,5 58.03,1.19 57.52,0.68 48.38,0.68 47.74,1.32 47.74,2.33 48.12,2.72 48.7,2.72 R5.2 | RESET-EN.1 59.02,43.61 64.25,43.61
RPI_SCL  (via drill 0.25)
  Top 0.152: IC3.42 40.28,14.18 39.48,13.38 37.33,13.38 33.14,17.57 33.14,32.81 31.74,34.21 v31.74,38.66
  Bottom 0.152: v31.74,38.66 24.5,38.66 23.23,39.93 23.23,43.1 18.15,48.18 14.09,48.18 13.45,48.82 BRD1.5
RPI_SDA  (via drill 0.25)
  Top 0.152: IC3.43 40.41,13.68 39.74,13 37.07,13 32.75,17.32 32.75,32.18 31.1,33.83 v31.1,37.39
  Bottom 0.152: v31.1,37.39 25.01,37.39 22.59,39.8 22.59,42.97 17.9,47.67 12.43,47.67 10.91,49.2 BRD1.3
TGT_NRESET  (via drill 0.25)
  Top 0.152: v36.06,7.03 36.06,13.51 32.37,17.19 32.37,31.67 v30.85,33.2 30.19,33.86 26.4,33.86 v24.27,31.72 | v42.79,7.03 43.64,7.03 IC3.52 | CON1.3 v44.44,34.08 | R9.1 v43.04,3.73 | v6.64,29.64 6.59,29.59 6.29,29.59 5.45,28.76 D4.A
  Bottom 0.152: v36.06,7.03 v42.79,7.03 42.79,6.4 43.04,6.14 v43.04,3.73 | v44.44,34.08 36.31,34.08 35.42,33.2 v30.85,33.2 | v6.64,29.64 6.69,29.64 9.49,32.43 10.45,32.43 11.57,31.32 23.86,31.32 v24.27,31.72
TGT_NRESET_DAPLINK  (via drill 0.25)
  Top 0.152: IC2.1 45.52,4.94 45.33,4.75 45.33,3.55 R6.2 45.28,2.54 44.95,2.21 v43.42,2.21 | IC4.8 11.3,37.91 11.55,38.15 12.43,38.15 13.07,38.78 13.07,39.29 13.7,39.93 18.91,39.93 19.67,39.16 v19.67,36.88 | v36.18,2.21 35.42,2.21 35.17,2.46 35.17,7.29 35.67,7.8 35.67,13.38 31.99,17.07 31.99,31.16 29.96,33.2 v29.2,33.2
  Bottom 0.152: v36.18,2.21 v43.42,2.21 | v29.2,33.2 23.36,33.2 v19.67,36.88
TGT_NRESET_FB  (via drill 0.25)
  Top 0.152: v12.69,32.43 12.18,32.94 12.18,33.45 12.03,33.6 IC4.1 | R24.1 v6.21,28.24
  Bottom 0.152: v6.21,28.24 6.21,28.88 5.7,29.39 5.7,32.18 7.1,33.58 11.55,33.58 v12.69,32.43
TGT_NRESET_FB_ISP  (via drill 0.25)
  Top 0.152: IC4.3 13.69,34.6 v14.72,33.58 | R25.1 6.21,23.42 v5.7,22.91
  Bottom 0.152: v5.7,22.91 4.94,23.67 4.94,32.05 7.48,34.59 13.7,34.59 v14.72,33.58
TGT_NRESET_RPI  (via drill 0.25)
  Top 0.152: R8.1 55.79,4.49 C4.1 54.62,4.52 54.05,3.94 T1.3 | IC2.2 46.78,5.59 46.98,5.38 v46.98,3.99 | 53.03,3.99 T1.3 | v51.8,3.99 51.85,3.94 T1.3
  Bottom 0.152: v46.98,3.99 v51.8,3.99
TGT_SWCLK  (via drill 0.25)
  Top 0.152: CON1.4 50.41,34.08 51.17,34.85 v51.17,39.8 | IC3.34 36.85,18.18 35.04,19.99 v35.04,39.8 35.04,44.37 36.31,45.64 BRD1.23 | IC4.18 5.56,36.6 5.32,36.37 5.32,36.12 5.07,35.86 4.18,35.86 3.93,35.99 3.93,36.75 4.18,37.01 v4.18,37.51
  Bottom 0.152: v4.18,37.51 6.21,37.51 7.1,38.4 12.18,38.4 13.7,39.93 18.78,39.93 22.47,36.24 33.64,36.24 35.04,37.64 v35.04,39.8 v51.17,39.8
TGT_SWDIO  (via drill 0.25)
  Top 0.152: IC4.17 5.29,37.1 v4.69,36.5 | IC3.37 40.64,16.68 40.5,16.81 36.56,16.81 33.9,19.48 33.9,33.7 v33.39,34.21 | CON1.2 49.26,35.35 49.9,35.99 49.9,37.51 v49.26,38.15
  Bottom 0.152: v4.69,36.5 5.32,37.13 6.34,37.13 7.23,38.02 12.31,38.02 13.83,39.55 18.66,39.55 23.86,34.34 v33.39,34.21 37.33,38.15 v49.26,38.15
USB-DM
  Top 0.152: R28.1 8.88,41.32 9.26,41.7 9.26,44.37 8.56,45.07 IC5.4
USB-DP  (via drill 0.25)
  Top 0.254: IC5.6 6.66,46.72 v6.21,47.17 | v5.2,40.31 5.78,40.77 R29.1
  Bottom 0.254: v6.21,47.17 6.72,46.66 6.72,41.45 v5.2,40.31
USB-SCON  (via drill 0.25)
  Top 0.152: T2.1 13.03,45.85 v13.58,46.4 | v5.83,38.66 6.21,39.04 7.23,39.04 7.5,38.76 IC4.15
  Bottom 0.152: v13.58,46.4 v5.83,38.66
VBUS_IF
  Top 0.254: CON2.VBUS 4.34,45.52 5.32,45.52 5.45,45.64 5.45,47.55 5.83,47.93 7.61,47.93 | 7.61,47.93 19.67,47.93 20.69,46.91 20.69,45.46 IC6.3 | IC5.5 7.61,47.93

## Text on the board
Top: cjs
tPlace: DAP | COM | PWR | RED | GRN | BLUE | PWR
tNames: !WP | Off | On | RX | GND | TX | GND | +3v3 | mbed 6LoWPAN Border Router HAT | v1.1